# Altium PCB Fingerboardv3.PcbDoc
Units mil, origin at the board's own origin, x right, y up, seen from the top; angles counter-clockwise.
Board outline 625 x 750 mil, 2 copper layers (Top Layer, Bottom Layer); 12 components, 14 nets, 70 pads, 15 vias.
Unrouted connection lines stored in the file: 13.
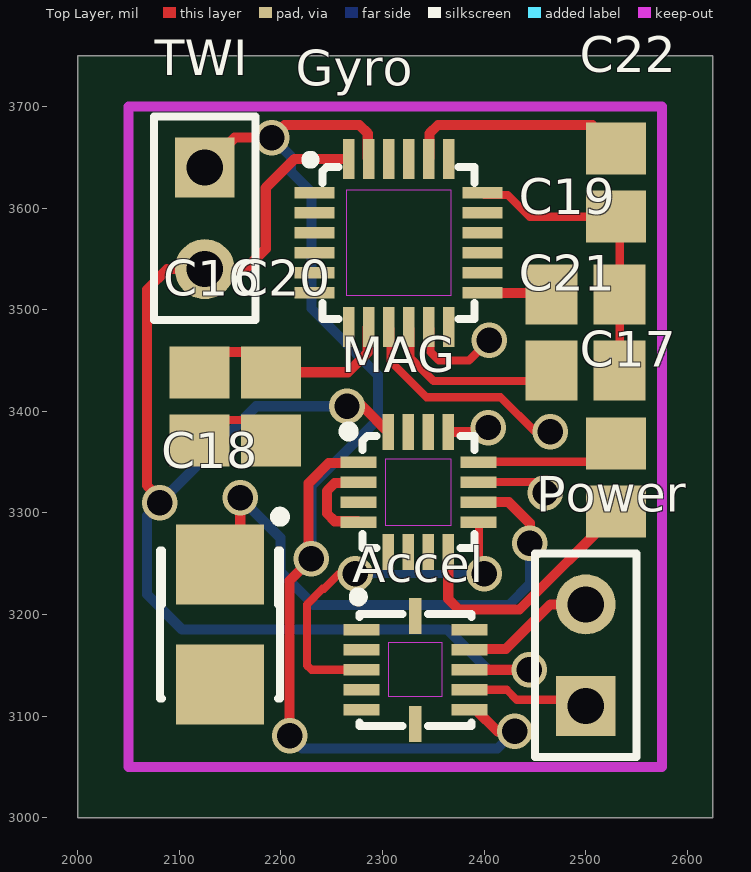
[diagram p0: Top Layer view]
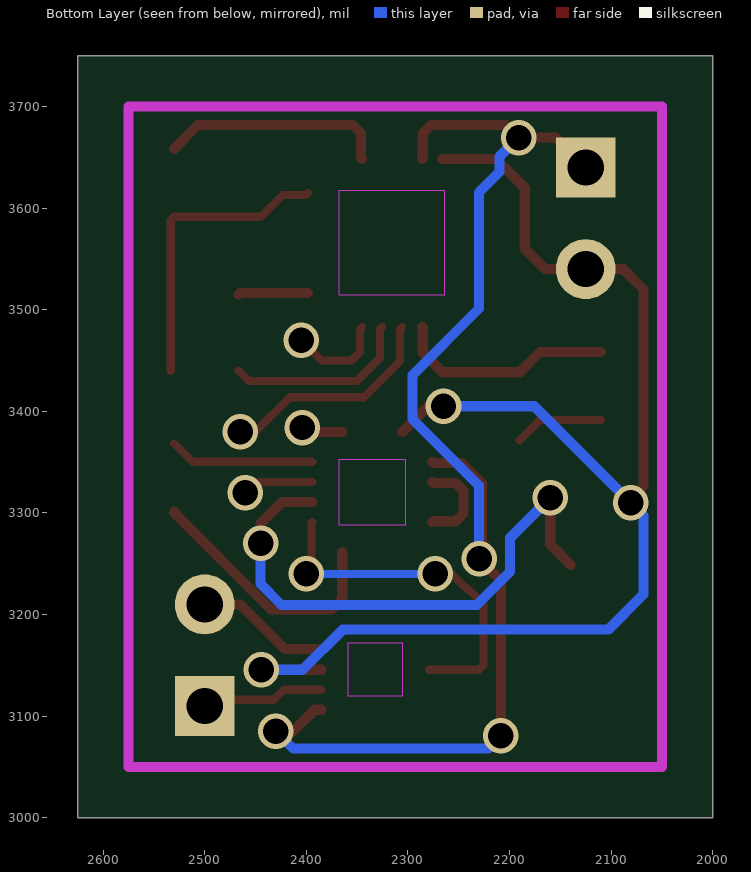
[diagram p1: Bottom Layer view, seen from below]

## Layer stack, top to bottom
Top Layer: signal copper 1.4
Dielectric: dielectric 12.6, FR-4, Dk 4.8
Bottom Layer: signal copper 1.4

## Board outline
2000,3000 2625,3000 2625,3750 2000,3750

## Design rules (kind name [scope] priority, off if disabled: settings)
Clearance "Polygon Clearance" [InPolygon] p1: gap=40
Clearance [All] p2: gap=8.1
HoleSize [All] p1: absolutevalues=TRUE maxlimit=100 minlimit=24 maxpercent=80.000 minpercent=20.000
PolygonConnect [All] p1: connectstyle=Relief reliefconductorwidth=10 reliefentries=4 polygonreliefangle="90 Angle"
RoutingVias [All] p1: holewidth=25 width=35 viastyle="Through Hole" minholewidth=25 minwidth=35 maxholewidth=25 maxwidth=35
SilkscreenOverComponentPads [All] p1: minsilkscreentomaskgap=10
SolderMaskExpansion [All] p1: expansion=4
Width [All] p1: maxlimit=50 minlimit=8 preferedwidth=8
26 further rules are at their usual default settings.

## Classes and differential pairs
component class Fingerboard: Power TWI
component class U_BMA180: Accel C16
component class U_HMC5883L: C17 C18 MAG
component class U_IMU3000: C19 C20 C21 C22 Gyro
net class AUX_TWI[1..0]: AUX_TWI0 AUX_TWI1
net class TWI[1..0]: TWI0 TWI1

## Components (designator, comment, footprint, x,y, rotation, side; value= is the part's Value field where it differs from the comment)
Accel "BMA180" "BMA180 - ECESHOP" 2285,3185 r270 top
C16 "Cap Semi" CAPC2012N 2120,3405 r90 top
C17 "Cap Semi" CAPC2012N 2530,3335 r90 top
C18 "Cap Pol1" TC3528-1411 2140,3190 r270 top
C19 "Cap Semi" CAPC2012N 2500,3515 r180 top
C20 "Cap Semi" CAPC2012N 2190,3405 r90 top
C21 "Cap Semi" CAPC2012N 2500,3440 r180 top
C22 "Cap Semi" CAPC2012N 2530,3625 r90 top
Gyro "IMU3000" "IMU3000 - ECESHOP" 2245,3615 r0 top
MAG "HMC5883L" "HMC5883L - ECESHOP" 2285,3350 r0 top
Power "Header 2" HDR1X2 2500,3110 r90 top
TWI "TWI" HDR1X2 2125,3640 r270 top

## Footprints (in the part's own frame and the unit in brackets; to place one, negate y for a bottom-side part, rotate by r counter-clockwise, add the part's x,y. Pads: shape width x height; smd on the part's side, far side on the other; paste and mask are expansions set on the pad)
"BMA180 - ECESHOP" [mm] "BMA180 - ECESHOP"
  rect 0.29x0.9 smd: 1(0,-0.15) 2(0.5,-0.15) 3(1,-0.15) 4(1.5,-0.15) 5(2,-0.15) 7(2,2.55) 8(1.5,2.55) 9(1,2.55) 10(0.5,2.55) 11(0,2.55)
  rect 0.9x0.32 smd: 6(2.35,1.2) 12(-0.35,1.2)
  Keep-Out Layer region: 0.328,0.524 1.658,0.524 1.658,1.876 0.328,1.876
  silkscreen extent -0.91,-0.31 2.4,2.6
CAPC2012N [mm] "Chip Capacitor, Body 2.0x1.3mm, IPC Medium Density"
  rect 1.3x1.5 smd: 1(-0.85,0) 2(0.85,0)
  body extent -1.1,-0.72 1.1,0.72, height 1.1
HDR1X2 [mm] "Connector; Header; 2 Position"
  rect 1.5x1.5 hole 0.9: 1(0,0)
  round 1.5 hole 0.9: 2(2.54,0)
  silkscreen extent -1.27,-1.27 3.81,1.27
"HMC5883L - ECESHOP" [mm]
  rect 0.9x0.29 smd: 1(-0.225,0) 2(-0.225,-0.5) 3(-0.225,-1) 4(-0.225,-1.5) 9(2.775,-1.5) 10(2.775,-1) 11(2.775,-0.5) 12(2.775,0)
  rect 0.29x0.9 smd: 5(0.525,-2.25) 6(1.025,-2.25) 7(1.525,-2.25) 8(2.025,-2.25) 13(2.025,0.75) 14(1.525,0.75) 15(1.025,0.75) 16(0.525,0.75)
  Keep-Out Layer region: 0.452,-1.572 2.099,-1.572 2.099,0.075 0.452,0.075
  silkscreen extent -0.57,-2.15 2.67,0.87
"IMU3000 - ECESHOP" [mm]
  rect 1x0.29 smd: 1(-0.3,0) 2(-0.3,-0.5) 3(-0.3,-1) 4(-0.3,-1.5) 5(-0.3,-2) 6(-0.3,-2.5) 13(3.9,-2.5) 14(3.9,-2) 15(3.9,-1.5) 16(3.9,-1) 17(3.9,-0.5) 18(3.9,0)
  rect 0.29x1 smd: 7(0.55,-3.35) 8(1.05,-3.35) 9(1.55,-3.35) 10(2.05,-3.35) 11(2.55,-3.35) 12(3.05,-3.35) 19(3.05,0.85) 20(2.55,0.85) 21(2.05,0.85) 22(1.55,0.85) 23(1.05,0.85) 24(0.55,0.85)
  Keep-Out Layer region: 0.488,-2.562 3.109,-2.562 3.109,0.066 0.488,0.066
  silkscreen extent -0.48,-3.15 3.7,0.9
TC3528-1411 [mm] "Capacitor, SM Tantalum; Body 3.5 x 2.8 mm (LxW typ)"
  rect 2x2.2 smd: 1(-1.5,0) 2(1.5,0)
  silkscreen extent -2.82,-1.5 1.85,1.63

## Part data
C16 C17 C19 C20 C21 C22: "Capacitor (Semiconductor SIM Model)"
C18: "Polarized Capacitor (Radial)"
Power: "Header, 2-Pin"
TWI: library part "Header 2", "Header, 2-Pin"

## Via types
v1: diameter 35, hole 25, Top Layer to Bottom Layer, 15 vias

## Nets (pads, with @x,y where several pads share a name; then routed paths per layer and width w, separated by ;. In a path a pad name is that pad's centre, name@x,y a point inside that pad or via, vN(x,y) a via of type N, cw(c..) or ccw(c..) an arc to the next point about the centre after c; other vN are vias at no path point)
3.3VCC: Accel.2 Accel.5 Accel.10 C16.2 C19.2 C20.2 Gyro.8 Gyro.13 MAG.2 MAG.4 MAG.13 Power.2 | length 551.3
  Top Layer w10: C16.2@2110,3458.46 2170,3458.46 C20.2 2265.93,3438.46 2285.46,3458 2285.46,3482.23 Gyro.8 ; MAG.4 2275.27,3291.82 2253,3291.82 2245.33,3299.5 2245.33,3321.76 2253,3329.44 2275.27,3329.44 MAG.2 ; MAG.13 2399.53,3379.53 v1(2404.07,3384.07) ; Accel.10 2386.27,3166.19 2421.5,3166.19 2465.31,3210 Power.2 ; Gyro.13 2464.96,3516.57 C19.2
AUX_TWI0: Gyro.7
AUX_TWI1: Gyro.6
GND: Accel.3 Accel.8 C16.1 C18.2 C19.1 C20.1 C21.1 C22.1 Gyro.9 Gyro.11 Gyro.18 MAG.9 MAG.11 Power.1 | length 1258.5
  Top Layer w8: C16.1@2110,3391.54 2170,3391.54 C20.1 ; v1(2273.1,3240) 2256.86,3240 2242.26,3225.4 2241.04,3225.4 2225.64,3210 2225.64,3150 2230.01,3145.63 Accel.3 ; Gyro.9 2307.9,3481.23 2307.9,3449.33 2343.33,3413.9 2416.1,3413.9 2450,3380 v1(2465,3380) ; Gyro.11 2347.27,3481.23 2347.27,3458.41 2355.68,3450 2385,3450 v1(2405,3470) ; Accel.8 2422.19,3125.95 2432.03,3116.11 2493.89,3116.11 Power.1 Power.1@2490,3100 ; MAG.9 2395,3290.2 2395,3245 v1(2400,3240) ; MAG.11 2449.68,3330.32 v1(2460,3320) ; Gyro.18 2400.42,3613.12 2423.24,3613.12 2444.83,3591.54 C22.1 2533.46,3588.07 C19.1 C21.1
  Bottom Layer w8: v1(2273.1,3240) v1(2400,3240)
NetAccel_4: Accel.4
NetC17_1: C17.1 MAG.8 | length 256.4
  Top Layer w10: MAG.8 2364.72,3215.28 2375,3205 2434.72,3205 2530,3300.28 C17.1
NetC17_2: C17.2 MAG.12 | length 143.4
  Top Layer w8: MAG.12 2394.65,3350.4 2511.94,3350.4 C17.2
NetC18_1: C18.1 MAG.10 | length 550.3
  Top Layer w10: C18.1 2160,3269.06 v1(2160,3315) ; MAG.10 2424.37,3310.63 2445,3290 v1(2445,3270)
  Bottom Layer w10: v1(2160,3315) 2199.4,3275.6 2199.4,3242.33 2232.33,3209.4 2424.4,3209.4 2445,3230 v1(2445,3270)
NetC21_2: C21.2 Gyro.10 | length 183.8
  Top Layer w8: Gyro.10 2327.58,3481.23 2327.58,3452.42 2350,3430 2456.54,3430 C21.2
NetC22_2: C22.2 Gyro.20 | length 222.4
  Top Layer w10: Gyro.20 2346.27,3649.34 2346.27,3673.58 2354.59,3681.9 2506.56,3681.9 C22.2
NetGyro_12: Gyro.12
NetINT_3: MAG.15
TWI0: Accel.7 Gyro.23 MAG.1 TWI.1 | length 1294.9
  Top Layer w10: TWI.1 2154.4,3669.4 v1(2191.13,3669.4) 2203.63,3681.9 2277.14,3681.9 2285.46,3673.58 2285.46,3649.34 Gyro.23 ; v1(2208.54,3080.6) 2208.54,3233.54 v1(2230,3255) 2227.23,3257.77 2227.23,3329.26 2247.09,3349.12 2275.27,3349.12 MAG.1 ; Accel.7 2391.84,3106.26 2413.1,3085 v1(2430,3085)
  Bottom Layer w10: v1(2191.13,3669.4) 2210,3650.53 2210,3635.53 2230,3615.53 2230,3501.2 2295.6,3435.6 2295.6,3392.33 2230,3326.73 v1(2230,3255) ; v1(2208.54,3080.6) 2221.04,3068.1 2413.1,3068.1 v1(2430,3085)
TWI1: Accel.9 Gyro.24 MAG.16 TWI.2 | length 1338.1
  Top Layer w10: v1(2080.6,3310) 2080.6,3314.4 2068.1,3326.9 2068.1,3520 2088.1,3540 TWI.2 2165,3540 2185,3560 2185,3620 2213.46,3648.46 Gyro.24 ; v1(2265,3405) 2280.2,3405 MAG.16 ; Accel.9 2444.22,3145.63 v1(2444.29,3145.71)
  Bottom Layer w10: v1(2265,3405) 2175.6,3405 v1(2080.6,3310) 2068.1,3297.5 2068.1,3220 2102.93,3185.17 2364.28,3185.17 2403.74,3145.71 v1(2444.29,3145.71)
pads on no net: Accel.1 Accel.6 Accel.11 Accel.12 Gyro.1 Gyro.2 Gyro.3 Gyro.4 Gyro.5 Gyro.14 Gyro.15 Gyro.16 Gyro.17 Gyro.19 Gyro.21 Gyro.22 MAG.3 MAG.5 MAG.6 MAG.7 MAG.14

## Keep-outs
Keep-Out Layer:
  lines w10: 2050,3050 2575,3050 2575,3700 2050,3700 2050,3050

## Dimensions
2050,3050 to 2575,3050 on Mechanical 1
2050,3050 to 2050,3700 on Mechanical 1